# Altium PCB QBOOST-v0.2 - copia.PcbDoc
Units mm, origin at the board's own origin, x right, y up, seen from the top; angles counter-clockwise.
Board outline 219 x 105.6 mm, 2 copper layers (Top Layer, Bottom Layer); 39 components, 19 nets, 113 pads, 56 vias.
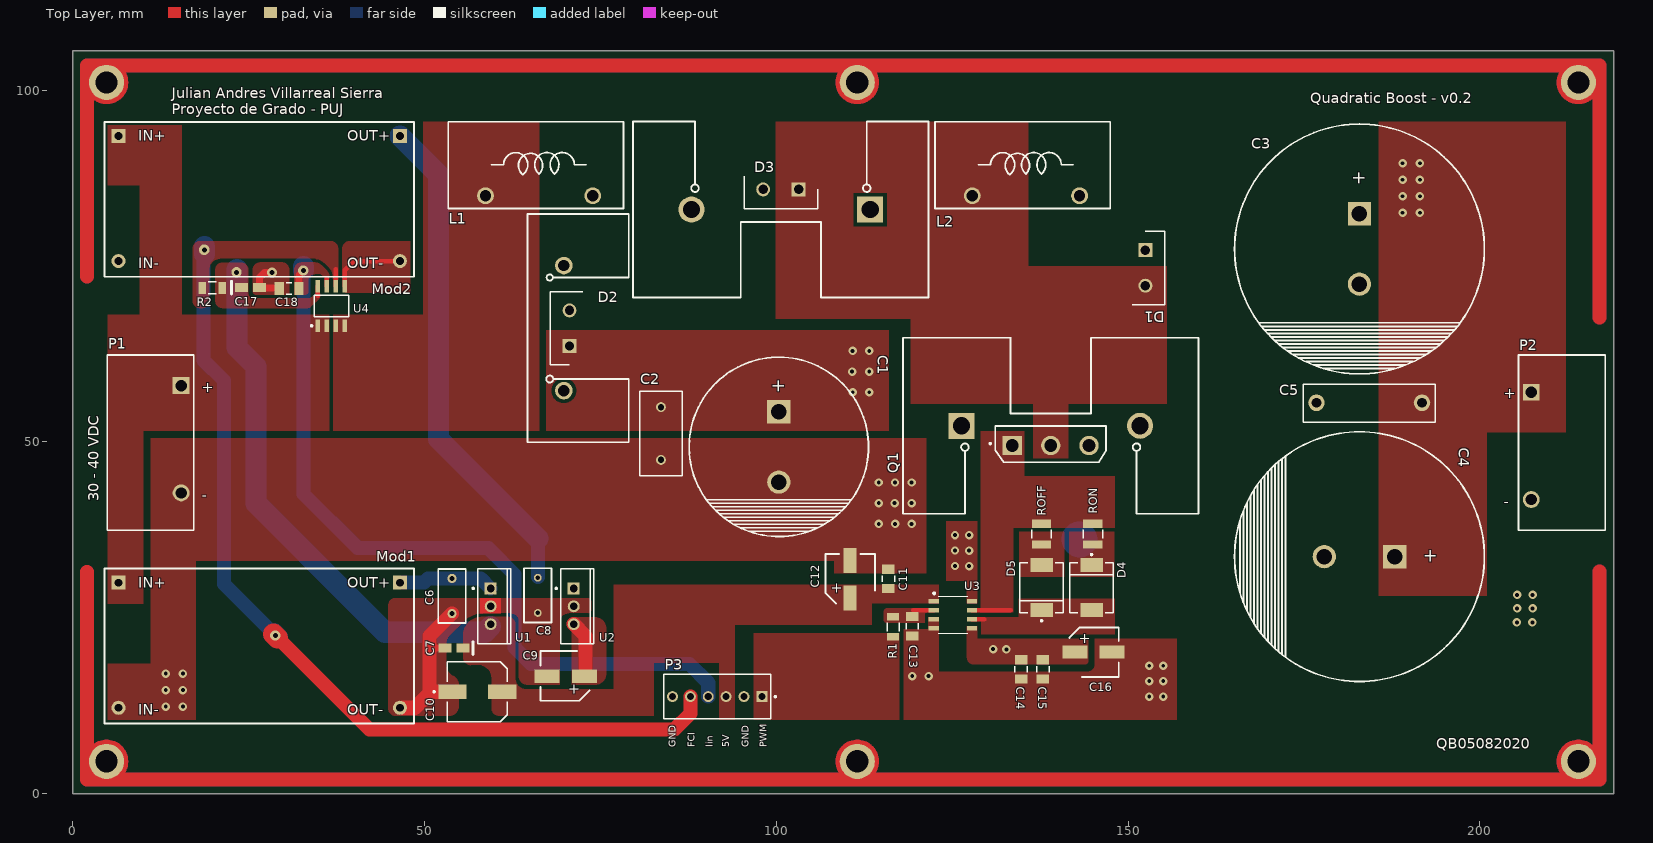
[diagram p0: Top Layer view]
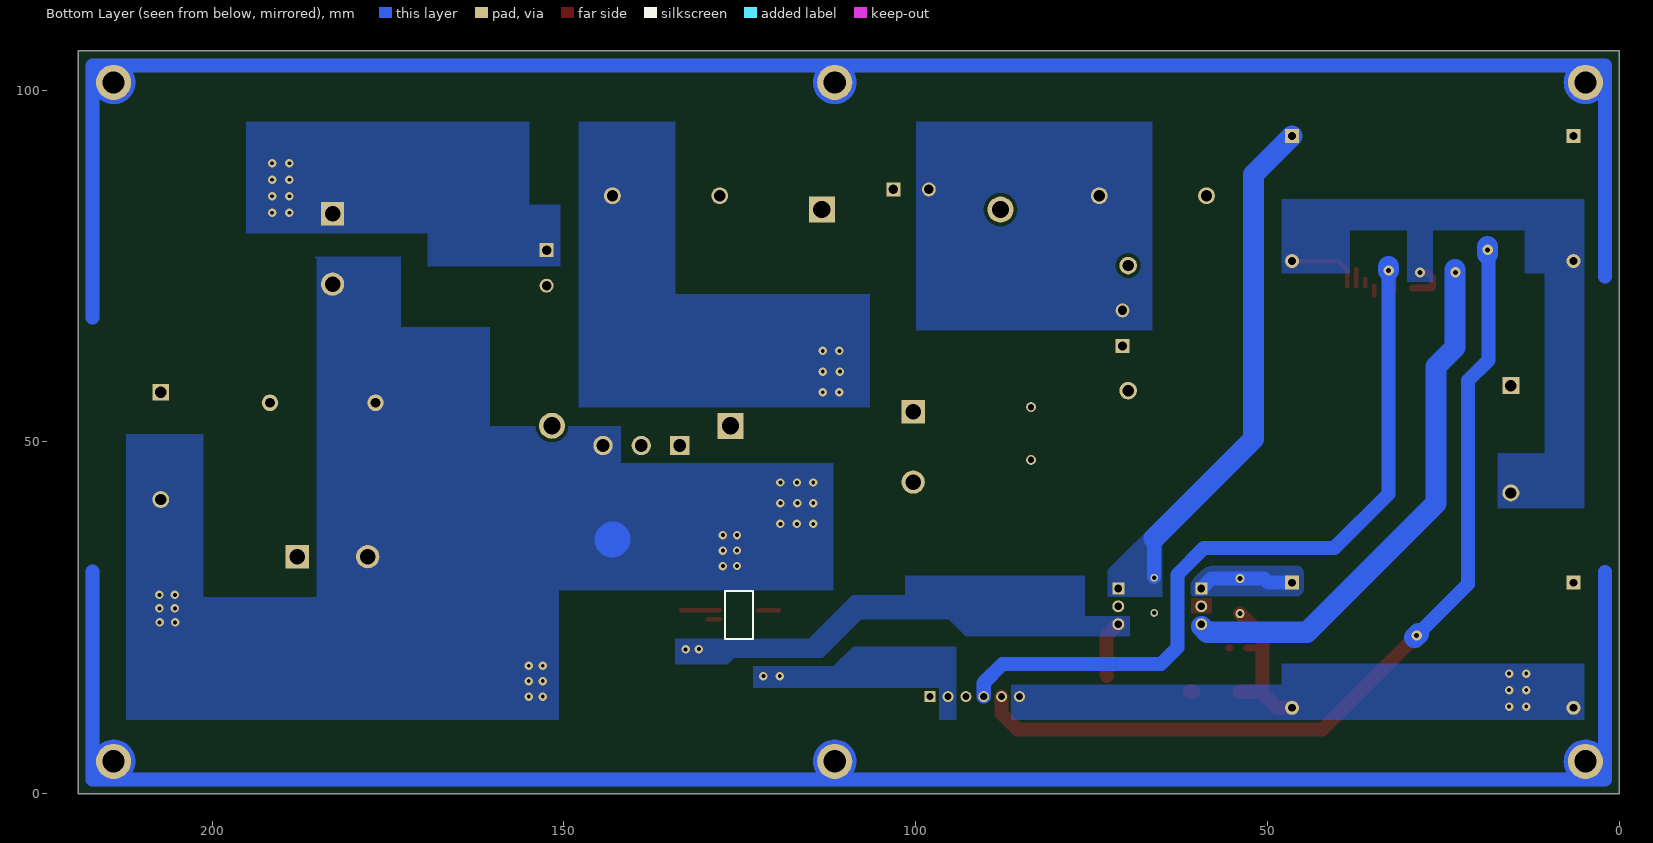
[diagram p1: Bottom Layer view, seen from below]
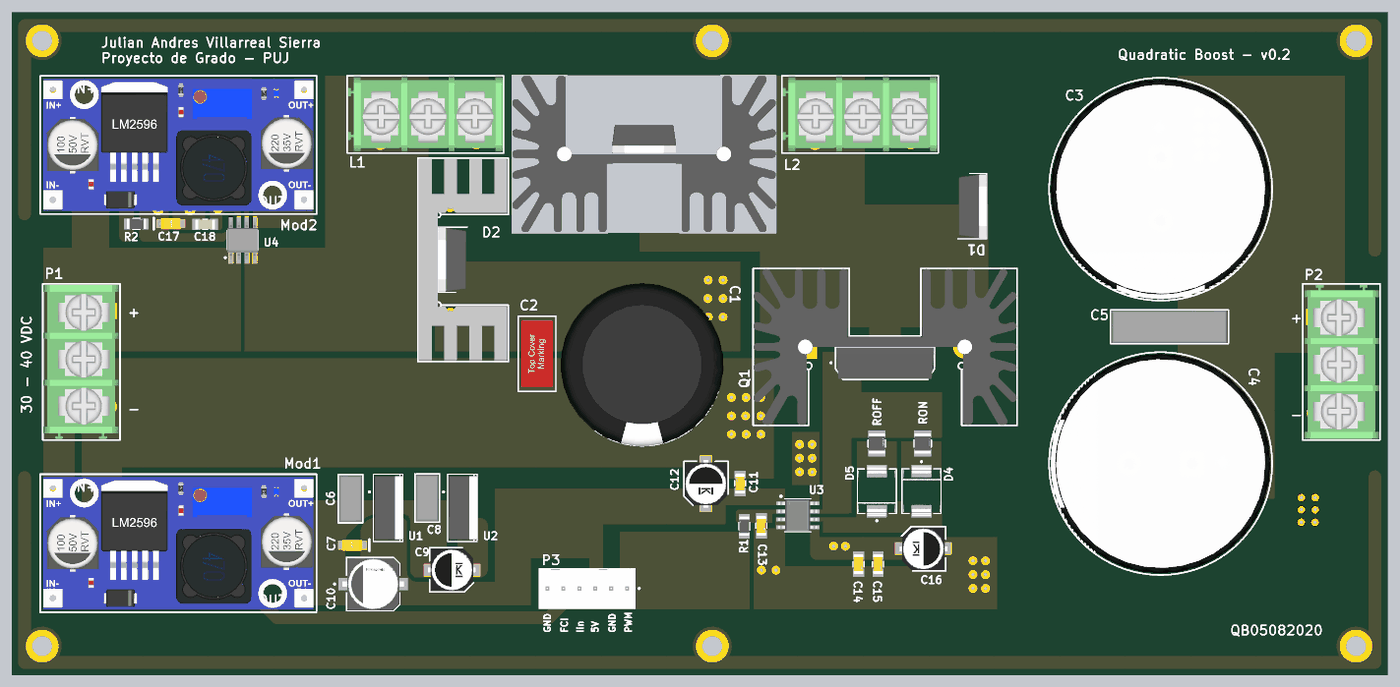
[diagram p2: 3D render of the assembled board from above, using the file's embedded part models]

## Layer stack, top to bottom
Top Solder: solder mask 0.0102, Solder Resist, Dk 3.5
Top Layer: signal copper 0.0356
Dielectric 1: dielectric 0.32, FR-4, Dk 4.8
Bottom Layer: signal copper 0.0356
Bottom Solder: solder mask 0.0102, Solder Resist, Dk 3.5

## Board outline
0,0 0,105.6 219,105.6 219,0

## Design rules (kind name [scope] priority, off if disabled: settings)
Clearance [All] p1: gap=0.5 ignorepadtopadclearanceinfootprint=FALSE
Height [All] p1: minheight=0 maxheight=70 prefheight=25
HoleSize [All] p1: absolutevalues=TRUE maxlimit=3.2 minlimit=0.5 maxpercent=80.000 minpercent=20.000
PolygonConnect [All] p1: connectstyle=Direct reliefconductorwidth=0.254 reliefentries=4 polygonreliefangle="90 Angle" airgapwidth=0.254
RoutingVias [All] p1: holewidth=0.7 width=1.47 viastyle="Through Hole" minholewidth=0.5 minwidth=1 maxholewidth=3.2 maxwidth=2
SolderMaskExpansion [All] p1: expansion=0.102
Width [All] p1: maxlimit=30 minlimit=0.254 preferedwidth=2
28 further rules are at their usual default settings.

## Components (designator, comment, footprint, x,y, rotation, side; value= is the part's Value field where it differs from the comment)
C1 "EET-UQ2C122CA" CAPPRD1000W200D2550H3700 100.354,54.3 r270 top
C2 "150nF, 250V" WCAP-FTBP_L10.5W5H11 83.6,51.2 r90 top
C3 "EET-UQ2G561EA" CAPPRD1000W200D3550H3700 182.88,82.43 r270 top
C4 "EET-UQ2G561EA" CAPPRD1000W200D3550H3700 187.88,33.7 r180 top
C5 "Capacitor Film 400V DC KEMET" "Cap Film 18x5" 191.77,55.57 r180 top
C6 "Capacitor FILM 0.47uF 5% 63VDC" "Capacitor 5mm Radial"#1 53.9,25.6 r90 top
C7 "T491A225K016AT" KEMT-T491-A_N 54.2,20.7 r180 top
C8 "Capacitor FILM 0.47uF 5% 63VDC" "Capacitor 5mm Radial"#2 66.1,25.7 r90 top
C9 "EMZR500ARA101MF80G" CAP6.3X8 78.75,19.025 r180 top
C10 "EEE-1HA101UP" FP-SF-MFG 57.5,14.5 r0 top value=100uF
C11 "CL31B105KBHNNNE" FP-CL31-IPC_B 115.92,30.54 r90 top
C12 "EEV226M050A9GAA" CAP6.3X5.65 110.45,30.49 r90 top
C13 "CL31C330JBCNNNC" FP-CL31-IPC_B 119.32,23.8 r270 top
C14 "CL31B224KBFNFNE" FP-CL31-IPC_B 134.79,17.67 r270 top
C15 "CL31B106KBHNNNE" FP-CL31-IPC_B 137.88,17.67 r270 top
C16 "EDH476M050A9HAA" CAP6.3X8 136.38,17.841 r0 top
C17 "T491A225K016AT" KEMT-T491-A_N 25.28,71.935 r0 top
C18 "C1206C471J5GACTU" FP-C1206C-EB-IPC_B 30.75,71.821 r180 top value="470 pF"
D1 "STPSC8065D" TO505P460X1020X1968-2P 152.45,77.26 r270 top
D2 "STPSC8065D_HEATSINK_V5229Y" "TO505P460X1020X1968-2P - HEATSINK - V5229Y" 69.816,57.284 r90 top
D3 "STPSC8065D_HEATSINK_RA-T2X-64E" "TO505P460X1020X1968-2P - HEATSINK - RA-T2X-64E" 113.343,83.041 r180 top
D4 "SS34-E3/57T" FP-95402-MFG 144.8,29.3 r270 top
D5 "SS34-E3/57T" FP-95402-MFG 137.7,29.295 r90 top
L1 "Inductor de potencia Externo" KF7.62-P3 58.66,85 r0 top
L2 "Inductor de potencia Externo" KF7.62-P3 127.86,85 r0 top
Mod1 "DC-DC LM2596" "Mod 21x43 mm" 6.5,30 r270 top
Mod2 "DC-DC LM2596" "Mod 21x43 mm" 6.5,93.491 r270 top
P1 "Terminal Block 2P - L" "KF7.62-P2 - TB - L" 15.4,42.76 r90 top
P2 "Terminal Block 2P - R" "KF7.62-P2 - TB - R" 207.3,57.06 r270 top
P3 "22-23-2061" MOLX-22-23-2061_V 91.59,13.8 r180 top
Q1 "STW65N65DM2AG with heatsink RA-T2X-64E" "FP-TO-247-0075325-MFG HEATSINK RA-T2X-64E" 139.298,47.365 r90 top
R1 "RC1206JR-51" FP-RC1206-IPC_B 116.601,23.72 r90 top value=0O
R2 "RC1206JR-51" FP-RC1206-IPC_B 19.82,71.904 r0 top value=0O
ROFF "RMCF1210JT5R10" FP-RC3225-IPC_B 137.685,36.907 r90 top
RON "RMCF1210JT5R10" FP-RC3225-IPC_B 144.99,36.907 r90 top
U1 "SCD7805BTG" T0220-3 59.4,26.64 r270 top
U2 "LM2940CT-15/NOPB" T0220-3 71.2,26.64 r270 top
U3 "UCC5310MCDR" D8_TEX 125.1,25.44 r0 top
U4 "ACS711KLCTR-12AB-T" ALEG-LC-SOIC-8_V 36.74,69.31 r0 top

## Footprints (in the part's own frame and the unit in brackets; to place one, negate y for a bottom-side part, rotate by r counter-clockwise, add the part's x,y. Pads: shape width x height; smd on the part's side, far side on the other; paste and mask are expansions set on the pad)
ALEG-LC-SOIC-8_V [mm] "SOIC, 8-Leads, Body 4.9x3.9mm, Pitch 1.27mm"
  rect 0.65x1.75 smd: 1(-1.905,-2.8) 2(-0.635,-2.8) 3(0.635,-2.8) 4(1.905,-2.8) 5(1.905,2.8) 6(0.635,2.8) 7(-0.635,2.8) 8(-1.905,2.8)
  silkscreen extent -2.9,-2.92 2.45,1.53, body extent -2.45,-3.05 2.45,2.95, height 1.51
CAP6.3X5.65 [mm] "Dia 6.3mm H 5.65mm"
  rect 3.55x1.85 smd: 1(-2.65,0) 2(2.65,0)
  silkscreen extent -3.43,-3.58 3.57,3.47, body extent -3.83,-3.42 3.78,3.37, height 5.67
CAP6.3X8 [mm] "Dia 6.3mm H 8mm"
  rect 3.55x1.85 smd: 1(6.05,2.325) 2(11.35,2.325)
  silkscreen extent 5.27,-1.25 12.27,5.8, body extent 4.92,-1.12 12.53,5.67, height 8.02
"Cap Film 18x5" [mm]
  round 2.35 hole 1.4: 1(0,0) 2(15,0)
  silkscreen extent -1.91,-2.63 16.89,2.75, body extent -1.65,-2.54 16.65,2.67, height 11.1
"Capacitor 5mm Radial"#1 [mm]
  round 1.3 hole 0.7: 1(0,0) 2(5,0)
  silkscreen extent -1.35,-1.95 6.35,1.95, body extent -1.2,-1.81 6.2,1.8, height 7.61
"Capacitor 5mm Radial"#2 [mm]
  round 1.1 hole 0.65: 1(0,0) 2(5,0)
  silkscreen extent -1.35,-1.95 6.35,1.95, body extent -1.2,-1.81 6.2,1.8, height 7.61
CAPPRD1000W200D2550H3700 [mm]
  rect 3.3x3.3 hole 2.2: 1(0,0)
  round 3.3 hole 2.2: 2(10,0)
  silkscreen extent -7.75,-12.75 17.75,12.75, body extent -8.17,-13.03 17.84,12.96, height 41.03
CAPPRD1000W200D3550H3700 [mm]
  rect 3.3x3.3 hole 2.2: 1(0,0)
  round 3.3 hole 2.2: 2(10,0)
  silkscreen extent -12.75,-17.75 22.75,17.75, body extent -12.5,-17.5 22.52,17.5, height 40.5
D8_TEX [mm]
  rect 1.455x0.6 smd paste+0 mask+0: 1(-2.721,1.905) 2(-2.721,0.635) 3(-2.721,-0.635) 4(-2.721,-1.905) 5(2.721,-1.905) 6(2.721,-0.635) 7(2.721,0.635) 8(2.721,1.905)
  silkscreen extent -2.79,-2.63 2.12,3.17, body extent -3.1,-2.5 3.1,2.5, height 1.76
FP-95402-MFG [mm]
  rect 2x3.2 smd paste+0 mask+0: 1(-3.205,0) 2(3.205,0)
  silkscreen extent -4.82,-3.11 3.55,3.11, body extent -4.17,-3.21 4.17,3.21, height 0.25
FP-C1206C-EB-IPC_B [mm]
  rect 1.305x1.806 smd paste+0 mask+0: 1(-1.401,0) 2(1.401,0)
  silkscreen extent -0.37,-0.8 0.37,0.8, body extent -2.3,-1.15 2.3,1.15, height 0.25
FP-CL31-IPC_B [mm]
  rect 1.305x1.758 smd paste+0 mask+0: 1(-1.376,0) 2(1.376,0)
  silkscreen extent -0.42,-0.88 0.42,0.88, body extent -2.28,-1.13 2.28,1.13, height 0.25
FP-RC1206-IPC_B [mm]
  rect 1.058x1.712 smd paste+0 mask+0: 1(-1.427,0) 2(1.427,0)
  silkscreen extent -0.6,-0.86 0.6,0.86, body extent -2.21,-1.11 2.21,1.11, height 0.25
FP-RC3225-IPC_B [mm]
  rect 1.155x2.756 smd paste+0 mask+0: 1(-1.476,0) 2(1.476,0)
  silkscreen extent -0.6,-1.38 0.6,1.38, body extent -2.3,-1.63 2.3,1.63, height 0.25
FP-SF-MFG [mm]
  rect 4x2 smd paste+0 mask+0: 1(-3.55,0) 2(3.55,0)
  silkscreen extent -6.27,-4.25 4.25,4.25, body extent -5.8,-4.5 5.8,4.5, height 0.25
"FP-TO-247-0075325-MFG HEATSINK RA-T2X-64E" [mm]
  rect 2.75x2.75 hole 1.8 paste-1000 mask+0: 1(2.127,5.75)
  round 2.75 hole 1.8 paste-1000 mask+0: 2(2.127,0.3) 3(2.127,-5.15)
  rect 3.7x3.7 hole 2.45 paste-1000 mask+0: 4(4.935,12.998)
  round 3.7 hole 2.45 paste-1000 mask+0: 5(4.935,-12.402)
  silkscreen extent -7.57,-20.7 17.43,21.3, body extent -7.51,-20.66 17.38,21.25, height 64.16
KEMT-T491-A_N [mm] "Molded Capacitor, 2-Leads, Body 3.40x1.80mm, IPC Medium Density"
  rect 1.85x1.25 smd: 1(-1.275,0) 2(1.275,0)
  silkscreen extent -2.7,-0.9 -2.7,0.9, body extent -1.7,-0.91 1.7,0.89, height 1.78
"KF7.62-P2 - TB - L" [mm]
  rect 2.4x2.4 hole 1.6: 1(15.24,0)
  round 2.4 hole 1.6: 2(0,0)
  silkscreen extent -5.3,-1.8 19.6,10.5, body extent -5.14,-1.61 19.4,10.41, height 12.22
"KF7.62-P2 - TB - R" [mm]
  rect 2.4x2.4 hole 1.6: 1(0,0)
  round 2.4 hole 1.6: 2(15.24,0)
  silkscreen extent -5.3,-1.8 19.6,10.5, body extent -5.14,-1.61 19.4,10.41, height 12.22
KF7.62-P3 [mm]
  round 2.4 hole 1.6: 1(0,0) 2(15.24,0)
  silkscreen extent -5.3,-1.8 19.6,10.5, body extent -5.14,-1.61 19.4,10.41, height 12.22
"Mod 21x43 mm" [mm]
  rect 2x2 hole 1.1: 1(0,0) 3(0,40)
  round 2 hole 1.1: 2(17.78,0) 4(17.78,40)
  silkscreen extent -2,-2 20,42, body extent -1.5,-1.5 19.5,41.5, height 14.82
MOLX-22-23-2061_V [mm] "THD, 6-Leads, Body 15.24x6.35mm, Pitch 2.54mm"
  rect 1.55x1.55 hole 1.02: 1(-6.35,0)
  round 1.55 hole 1.02: 2(-3.81,0) 3(-1.27,0) 4(1.27,0) 5(3.81,0) 6(6.35,0)
  silkscreen extent -8.4,-3.18 7.62,3.18, body extent -7.54,-3.25 7.54,3.1, height 10.67
T0220-3 [mm] "FM, 3-Leads, Body 10.7x4.7mm, Pitch 2.54mm"
  rect 1.7x1.7 hole 1.1: 1(-2.54,0)
  round 1.7 hole 1.1: 2(0,0) 3(2.54,0)
  silkscreen extent -5.35,-2.62 5.35,2.85, body extent -5.08,-1.69 5.08,2.88, height 19.56
TO505P460X1020X1968-2P [mm]
  rect 1.98x1.98 hole 1.32: 1(0,0)
  round 1.98 hole 1.32: 2(5.05,0)
  silkscreen extent -2.68,-1.88 7.73,2.72, body extent -2.56,-1.74 7.64,2.76, height 19.68
"TO505P460X1020X1968-2P - HEATSINK - RA-T2X-64E" [mm]
  rect 1.98x1.98 hole 1.32: 1(10.166,-2.859)
  round 1.98 hole 1.32: 2(15.216,-2.859)
  rect 3.7x3.7 hole 2.45 paste-1000 mask+0: 3(0.002,0.01)
  round 3.7 hole 2.45 paste-1000 mask+0: 4(25.402,0.01)
  silkscreen extent -8.3,-12.49 33.7,12.51, body extent -8.25,-12.44 33.66,12.46, height 64.16
"TO505P460X1020X1968-2P - HEATSINK - V5229Y" [mm]
  rect 1.98x1.98 hole 1.32: 1(6.366,-0.784)
  round 1.98 hole 1.32: 2(11.416,-0.784)
  round 2.5 hole 1.6: 3(0.006,0.02) 4(17.786,0.02)
  silkscreen extent -7.31,-9.2 25.1,5.2, body extent -7.1,-9 24.9,5, height 50.01
WCAP-FTBP_L10.5W5H11 [mm] "Film Capacitors, 10.5x5x11mm"
  round 1.4 hole 0.9: 1(-3.75,0) 2(3.75,0)
  silkscreen extent -6,-3 6,3, body extent -5.25,-2.5 5.25,2.5, height 11.05

## Part data
C1 C3 C4: "Capacitor Polarised", Manufacturer_Name=Panasonic, Datasheet Link=https://media.digikey.com/pdf/Data%20Sheets/Panasonic%20Capacitors%20PDFs/TS-UQ_Series_2007.pdf, Height=37mm
  C1: Arrow Part Number=EET-UQ2C122CA, Manufacturer_Part_Number=EET-UQ2C122CA
  C3 C4: Arrow Part Number=EET-UQ2G561EA, Manufacturer_Part_Number=EET-UQ2G561EA
C2: library part 890273322005CS, "WCAP-FTBP Film Capacitor, THT, L10.5W5H11, 150nF, 250V", Capacitance=150nF, Capacitance Tolerance=+/-5%, Insulation Resistance=30000MOhm, Manufacturer="Wurth Elektronik", Operating Temperature="-40 to +105degC", Rated Voltage=250VDC, Rate of Voltage Rise=340V/us, ComponentLink1Description=Manufacturer, ComponentLink1URL=http://www.we-online.de, ComponentLink2Description=Datasheet, ComponentLink2URL=https://www.we-online.com/catalog/datasheet/890273322005CS.pdf, Dissipation Factor@1kHz=0.1%, Dissipation Factor@10kHz=0.1%, Dissipation Factor@100kHz=0.26%, Height=11mm, Length=10.5mm, Manufacturer Part Number=890273322005CS, Mounting Technology=THT, Packaging=Carton, Pitch=7.5mm, Published Date="May 2020", Technical Reference=MPPP075154J250DCPP45004, Width=5mm
C5: library part "Cap film 400V DC 0.1uF"
C7 C17: library part CMP-2000-07187-1, "Tantalum Capacitor, 2.2 uF, +/- 10%, 16 V, -55 to 125 degC, 2-Pin SMD, RoHS, Tape and Reel", Capacitance=2200000pF, Case Code=A, Case Style=Molded, Manufacturer=Kemet, Operating Temp Range=-55Cto125C, Package / Case=3216-18, Package Description="2-Pin Surface Mount Device, Body 3.2 x 1.6 mm", Package Reference=T491-A, Tolerance (+ or -)=10%, Voltage=16VDC, Construction=SMTChip, Datasheet URL=http://capacitoredge.kemet.com/capedge2/DataSheet/Datasheet-T491A225K016AT.pdf?pn=T491A225K016AT, Datasheet Version=10/2016, DCL=0.4uA, DF=6%, ESR=6ohm, Failure Rate=NotRequired, Insulation=NotRequired, Lead Spacing (nom)=NotRequiredmm, Length W/Weld=NotRequiredmm, Length W/Weld (max)=NotRequiredmm, Manufacturer URL=http://www.kemet.com/, Mounting Style=SurfaceMount, Mounting Technology=SurfaceMount, Packaging=TapeandReel, Polarity=Polar, Product Depth (mm)=1.6mm, Product Diameter (mm)=NotRequiredmm, Product Height (mm)=1.6mm, Product Length (mm)=3.2mm, Rad Hardened=No, Seal=NotRequired, Seated Plane Height=NotRequiredmm, Wire Form=NotRequired
C9: "CAP ALUM 100UF 20% 50V SMD", Manufacturer_Name="United Chemi-Con", Datasheet Link=http://www.chemi-con.co.jp/cgi-bin/CAT_DB/SEARCH/cat_db_al.cgi?e=e&j=p&pdfname=mzr, Height=8.2mm, Manufacturer_Part_Number=EMZR500ARA101MF80G
C10: library part CMP-05427-000015-1, "CAP ALUM 100UF 20% 50V SMD", Capacitance=100uF, Leakage Current=100uA, Manufacturer=Panasonic, Package=SF, Ripple Current=200mA, Temperature="-40°C to +85°C", Temperature Range High=+85°C, Temperature Range Low=-40°C, Tolerance=20%, Voltage=50V, Automotive=Yes, Automotive Grade="Grade 3", Category=Cap, ComponentLink2Description=Datasheet, ComponentLink2URL=https://industrial.panasonic.com/cdbs/www-data/pdf/RDE0000/ABA0000C1145.pdf, Device Class L1="Passive Components", Device Class L2=Capacitors, Device Class L3="Aluminum Electrolytic Capacitors", Digikey Description="CAP ALUM 100UF 20% 50V SMD", Dissipation Factor=0.12%, Height=10.5mm, Lead Free=Yes, Life=2000Hours, Manufacturer Part Number=EEE-1HA101UP, Material=Aluminum, Mouser Description="Cap Aluminum Lytic 100uF 50V 20% (8 X 10.2mm) SMD 200mA 2000h 85C Automotive T/R", Octopart=https://octopart.com/eee-1ha101up-panasonic-55396734, RoHS=TRUE, Voltage Rating=50V
C11: library part CMP-13271-001662-1, "Cap Ceramic 1uF 50V X7R ±10% SMD 1206 +125°C Embossed T/R", Capacitance=1uF, Case/Package=1206, Case Code (Metric)=3216, Dielectric=X7R, Max Operating Temperature=125°C, Min Operating Temperature=-55°C, Package Quantity=1, Tolerance=10%, Voltage=50V, Case Code (Imperial)=1206, Contact Plating=Tin, Depth=1.6mm, Height=1.6mm, Lead Free="Lead Free", Length=3.2mm, Material=Ceramic, Mount="Surface Mount", Packaging="Tape and Reel", Radiation Hardening=No, Thickness=0.071inch, Voltage Rating=50V, Voltage Rating (DC)=50V, Width=0.063inch
C12: "CAP ALUM SMD 105C 22UF 50VDC", Manufacturer_Name=KEMET, Datasheet Link=https://content.kemet.com/datasheets/KEM_A4002_EEV.pdf, Height=5.65mm, Manufacturer_Part_Number=EEV226M050A9GAA
C13: library part CMP-13271-000198-1, "Cap Ceramic 33pF 50V C0G ±5% SMD 1206 +125°C Embossed T/R", Capacitance=33pF, Case/Package=1206, Case Code (Metric)=3216, Dielectric=C0G, Max Operating Temperature=125°C, Min Operating Temperature=-55°C, Package Quantity=1, Temperature Coefficient=300ppm/°C, Tolerance=5%, Voltage=50V, Case Code (Imperial)=1206, Depth=1.6mm, Height=0.85mm, Lead Free="Lead Free", Length=3.2mm, Material=Ceramic, Mount="Surface Mount", Packaging="Tape and Reel", Radiation Hardening=No, Thickness=0.039inch, Voltage Rating=50V, Voltage Rating (DC)=50V, Width=0.063inch
C14: library part CMP-13271-000776-1, "Cap Ceramic 220nF 50V X7R ±10% SMD 1206 +125°C Embossed T/R", Capacitance=220nF, Case/Package=1206, Case Code (Metric)=3216, Dielectric=X7R, Max Operating Temperature=125°C, Min Operating Temperature=-55°C, Package Quantity=1, Tolerance=10%, Voltage Rating=50V, Case Code (Imperial)=1206, Depth=1.6mm, Height=1.25mm, Length=0.126inch, Mount="Surface Mount", Packaging="Tape and Reel", Radiation Hardening=No, Thickness=0.055inch, Width=0.063inch
C15: library part CMP-13271-000776-1, "CAP CER 10UF 50V  X7R ±10% SMD 1206 +125°C Embossed T/R", Capacitance=220nF, Case/Package=1206, Case Code (Metric)=3216, Dielectric=X7R, Max Operating Temperature=125°C, Min Operating Temperature=-55°C, Package Quantity=1, Tolerance=10%, Voltage Rating=50V, Case Code (Imperial)=1206, Depth=1.6mm, Height=1.25mm, Length=0.126inch, Mount="Surface Mount", Packaging="Tape and Reel", Radiation Hardening=No, Thickness=0.055inch, Width=0.063inch
C16: "CAP ALUM SMD 105C 47UF 50VDC", Manufacturer_Name=KEMET, Datasheet Link=https://content.kemet.com/datasheets/KEM_A4049_EDH.pdf, Height=8mm, Manufacturer_Part_Number=EDH476M050A9HAA
C18: library part CMP-03020-008367-1, "1206 C 470pF Ceramic Multilayer Capacitor; 50 V; +125degC; C0G Dielectric; +/-5%", Capacitance="470 pF", Manufacturer=KEMET, Package=C1206C-EB, Temperature="-55°C to +150°C", Temperature Characteristic=C0G, Temperature Coefficient=15%, Temperature Range High=+150°C, Temperature Range Low=-55°C, Tolerance=0.05, Voltage Rating="50 V", Automotive=Yes, Automotive Grade="Grade 0", Category=Cap, ComponentLink2Description=Datasheet, ComponentLink2URL=https://content.kemet.com/datasheets/KEM_C1007_X8R_ULTRA_150C_SMD.pdf, Device Class L1="Passive Components", Device Class L2=Capacitors, Device Class L3="Ceramic Capacitors", Digikey Description="1206 C 470pF Ceramic Multilayer Capacitor; 50 V; +125degC; C0G Dielectric; +/-5%", Height=0.88mm, Ipc Land Pattern Name=CAPC320160X78, Lead Free=Yes, Manufacturer Part Number=C1206C471J5GACTU, Material=Ceramic, Mouser Description="1206 C 470pF Ceramic Multilayer Capacitor; 50 V; +125degC; C0G Dielectric; +/-5%", Octopart=https://octopart.com/c1206c471j5gactu-kemet-123947, RoHS=TRUE
D1: "Diode", Manufacturer_Name=STMicroelectronics, Arrow Part Number=STPSC8065D, Datasheet Link=http://www.mouser.com/datasheet/2/389/stpsc8065-1156476.pdf, Height=4.6mm, Manufacturer_Part_Number=STPSC8065D
D2: "Diode with heatsink V5229Y", Arrow Part Number=STPSC8065D, Manufacturer_Name=STMicroelectronics, Datasheet Link=http://www.mouser.com/datasheet/2/389/stpsc8065-1156476.pdf, Height=4.6mm, Manufacturer_Part_Number=STPSC8065D
D3: "Diode with heatsink RA-T2X-64E", Arrow Part Number=STPSC8065D, Manufacturer_Name=STMicroelectronics, Datasheet Link=http://www.mouser.com/datasheet/2/389/stpsc8065-1156476.pdf, Height=4.6mm, Manufacturer_Part_Number=STPSC8065D
D4 D5: library part CMP-02539-000012-1, "DIODE SCHOTTKY 40V 3A DO214AB", Forward Current=3A, Manufacturer=Vishay, Max Junction Temp=+150°C, Max Repetitive Reverse Voltage=40V, Max Surge Forward Current=100A, Package=95402, Peak Reverse Current=0.5mA, Temperature="-55°C to +150°C", Temperature Range Low=-55°C, Automotive=No, Category=Diode, ComponentLink2Description=Datasheet, ComponentLink2URL=http://www.vishay.com/docs/88751/ss32.pdf, Device Class L1="Discrete Semiconductors", Device Class L2=Diodes, Device Class L3="Schottky Diodes", Digikey Description="DIODE SCHOTTKY 40V 3A DO214AB", Footprint Url=http://www.vishay.com/docs/95402/smc.pdf, Height=2.62mm, Lead Free=Yes, Manufacturer Part Number=SS34-E3/57T, Mouser Description="Schottky Diodes & Rectifiers 3.0 Amp 40 Volt", Octopart=https://octopart.com/ss34-e3%2F57t-vishay-39552907, RoHS=TRUE, Standoff Height=0mm, Temperature Range High=+150°C
L1 L2: library part Inductor
Mod1 Mod2: "LM2596HV DC-DC Adjustable Step Down Buck Converter Power Module 4.5-50V To 3-35V Current limiting"
P1 P2: "Bornera con espaciado entre pines de 7.62mmSoporta hasta 20Amperios / Voltaje máximo de trabajo 300V / Calibre de cable ideal para acoplar 22 hasta 12 AWG / Cuenta con acoples laterales para aumentar los terminales"
P3: library part CMP-2000-05536-1, "Male Header, Pitch 2.54 mm, 1 x 6 Position, Height 10.67 mm, Tail Length 3.56 mm, 0 to 70 degC, RoHS, Bulk", Current rating=4A, Manufacturer=Molex, Package Description="Male Header, Pitch 2.54 mm, 1 x 6 Position, Height 10.67 mm, Tail Length 3.56 mm", Voltage Rating=250V, =002223206122-23-2061-PBA-6373-06A102, Brand=Molex, Contact material=Brass, Contact Plating=Tin, Datasheet URL=https://datasheet.ciiva.com/19460/232303-19460895.pdf, Datasheet Version="Rev. P, 09/2001", Factory Pack Quantity=1000, Housing material=Nylon, Manufacturer URL=http://www.molex.com/, Mounting Angle=Vertical, Mounting Style=ThroughHole, Mounting Technology=ThroughHole, Number of Positions=6, Number of Positions / Contacts=6, Number of Rows=1, Package Reference=22-23-2061, Packaging=Bulk, Pitch=2.54mm, Product Category=.100K.K.Connectors, Product Type=Headers, RoHS=Details, Series=6373, Termination Style=ThroughHole, Tradename=KK, Type=PinStrip
Q1: library part "MOSFET N STW65N65DM2AG_HEATSINK", "MOSFET N-CH 650V 60A TO-247", Continuous Drain Current=38A, Drain To Source Breakdown Voltage=650V, Drain To Source Resistance=0.05O, Gate To Source Voltage=25V, Input Capacitace At Vds="5500pF @ 100V", Manufacturer=STMicroelectronics, Manufacturer Part Number=STW65N65DM2AG, Max Forward Diode Voltage=1.6V, Max Junction Temp=+150°C, Package=TO-247-0075325, Power Dissipation=446W, Pulse Drain Current=240A, Temperature="-55°C to +150°C", Temperature Range Low=-55°C, Automotive=Yes, Automotive Grade="Grade 0", Category=Trans, ComponentLink2Description=Datasheet, ComponentLink2URL=https://www.st.com/resource/en/datasheet/stw22n95k5.pdf, Depletion Mode=False, Device Class L1="Discrete Semiconductors", Device Class L2=Transistors, Device Class L3=MOSFETs, Digikey Description="MOSFET N-CH 650V 60A TO-247", Drain To Source Voltage=650V, Gate Charge At Vgs="27nC @ 10V", Height=24.45mm, Ipc Land Pattern Name=TO-220, Lead Free=Yes, Number Of Channels=1, Number Of N Channels=1, Reverse Recovery Charge=3.65uC, Reverse Recovery Time=288ns, RoHS=TRUE, Rthja Max=50°C/W, Standoff Height=3.7mm, Temperature Range High=+150°C, Threshold Vgs Max=5V, Threshold Vgs Min=3V, Turn Off Delay Time=65ns, Turn On Delay Time=18ns
R1 R2: library part CMP-03412-007570-1, "RES SMD 51 OHM  1/4W 1206", Manufacturer=YAGEO, Manufacturer Part Number=RC1206JR-070RL, Package=RC1206, Power Rating=0.25W, Resistance=0O, Temperature="-55°C to +155°C", Temperature Coefficient=300ppm/°C, Temperature Range High=+155°C, Temperature Range Low=-55°C, Tolerance=5%, Voltage Rating=200V, Automotive=No, Category=Res, ComponentLink2Description=Datasheet, ComponentLink2URL=https://www.yageo.com/upload/media/product/productsearch/datasheet/rchip/PYu-RC_Group_51_RoHS_L_10.pdf, Composition="Thick Film", Device Class L1="Passive Components", Device Class L2=Resistors, Device Class L3="Chip SMD Resistors", Digikey Description="RES SMD 0 OHM JUMPER 1/4W 1206", Footprint Url=https://www.yageo.com/upload/website/yageo_PYu-R_Mount_10_19050818_343.pdf, Height=0.65mm, Ipc Land Pattern Name=RESC310160X55, Lead Free=Yes, Mouser Description="Resistor: thick film; SMD; 1206; 0O; 0.25W; ±5%; -55÷155°C", Octopart=https://octopart.com/rc1206jr-070rl-yageo-40025601, RoHS=TRUE, Series=RC
ROFF RON: library part CMP-13261-001722-1, "RES 5.1 OHM 5% 1/2W 1210", Case/Package=1210, Case Code (Metric)=3225, Max Operating Temperature=155°C, Max Power Dissipation=333mW, Min Operating Temperature=-55°C, Resistance=51R, Temperature Coefficient=100ppm/°C, Tolerance=5%, Voltage Rating (DC)=200V, Case Code (Imperial)=1210, Composition="Thick Film", Contact Plating=Tin, Features="Moisture Resistant", Height=0.026inch, Lead Free="Lead Free", Length=0.126inch, Number of Terminations=2, Packaging="Tape and Reel", Radiation Hardening=No, Width=0.1inch
U1: library part SCD7805BTGOS-ND, "IC VOLT REG 1A 5V TO220 3-pin", Manufacturer="On Semiconductor", PackageTopMarking="NSUZXYTTE#*LM2940CT*-15 P+", PowerWise=N, ComponentLink1Description="Datasheet URL", ComponentLink1URL=http://www.ti.com/general/docs/lit/getliterature.tsp?genericPartNumber=LM2940C&fileType=pdf, CompType="LDO IC", PackageDescription="TO-220, Molded, 3 Lead, Straight", PackageReference="CASE 221AB-01", PinCount=3, RoHS=Y
U2: library part CMP-0062-02546-3, "1A Low Dropout Regulator, 3-pin TO-220, Pb-Free", Manufacturer="Texas Instruments", PackageTopMarking="NSUZXYTTE#*LM2940CT*-15 P+", PowerWise=N, ComponentLink1Description="Datasheet URL", ComponentLink1URL=http://www.ti.com/general/docs/lit/getliterature.tsp?genericPartNumber=LM2940C&fileType=pdf, CompType="LDO IC", PackageDescription="TO-220, Molded, 3 Lead, Straight", PackageReference=NDE0003A, PinCount=3, RoHS=Y
U3: "No Description Available", Built_By=EMA_Molly, Copyright="Copyright (C) 2018 Accelerated Designs. All rights reserved", Manufacturer_Part_Number=UCC5310MCDR, RefDes=RefDes, SourceLibrary=TI_2020-05-18, Type=DEV, Vendor="Texas Instruments"
U4: "Hall Effect Linear Current Sensor with Overcurrent Fault Output for <100 V Isolation Applications, 3 to 5.5 V, -12.5 to 12.5 A IP, -40 to 125 degC, 8-Pin SOIC (LC), RoHS, Tape and Reel", Temperature Max="125 degC", Temperature Min="-40 degC", -3dB Bandwidth="0.1 MHz", ComponentLink1Description="Manufacturer URL", ComponentLink1URL=http://www.allegromicro.com/, ComponentLink2Description=Datasheet, ComponentLink2URL=http://www.allegromicro.com/~/media/Files/Datasheets/ACS711-Datasheet.ashx?la=en, ComponentLink3Description="Package Specification", ComponentLink3URL=http://www.allegromicro.com/~/media/Files/Datasheets/ACS711-Datasheet.ashx?la=en, DatasheetVersion="Rev. 3", IP Max="12.5 A", IP Min="-12.5 A", Mounting Technology="Surface Mount", PackageDescription="8-Pin Small Outline Integrated Package, Body 4.9 x 3.9 mm, Pitch 1.27 mm", Packing="Tape and Reel", PartNumber=ACS711KLCTR-12AB-T, RoHS=TRUE, VCC Max="5.5 V", VCC Min="3 V"

## Free pads (board coordinates)
  round 5 hole 3.175: 29(4.8,4.6) 29(4.8,101.1) 29(111.5,4.6) 29(111.5,101.1) 29(214,4.6) 29(214,101.1)

## Via types
v1: diameter 1.2, hole 0.55, Top Layer to Bottom Layer, 51 vias
v2: diameter 1.47, hole 0.711, Top Layer to Bottom Layer, 5 vias

## Nets (pads, with @x,y where several pads share a name; then routed paths per layer and width w, separated by ;. In a path a pad name is that pad's centre, name@x,y a point inside that pad or via, vN(x,y) a via of type N, cw(c..) or ccw(c..) an arc to the next point about the centre after c; other vN are vias at no path point)
GND: C1.2 C2.1 C3.2 C4.2 C5.2 C6.1 C7.2 C8.1 C9.2 C10.1 C11.2 C12.2 C13.2 C14.2 C15.2 C16.2 C17.2 C18.2 Mod1.2 Mod1.4 Mod2.2 Mod2.4 P1.2 P2.2 P3.2 P3.6 Q1.3 U1.2 U2.2 U3.3 U3.4 U3.8 U4.5 | length 39.9
  Top Layer w0.65: C17.2@26.55,71.97 C17.2@26.61,71.91 ; U4.5 38.645,74.416 39.94,75.711 Mod2.4 Mod2.4@46.89,75.711
  Top Layer w1: C17.2@26.55,71.97 26.55,73.359 27.282,74.091 v2(28.32,74.091) ; C17.2@26.61,71.91 26.637,71.883 29.323,71.883 C18.2@29.349,71.857 ; 50.7,20.7 C7.2
  Top Layer w2: Mod1.4@46.9,12.22 48.67,12.22 50.95,14.5 50.7,14.5 50.7,20.7 50.7,22.4 C6.1 ; 51.4,14.5 C10.1
  Bottom Layer w5: 143.048,36.162 143.12,36.09
  other v1: 13.22,12.38 15.66,12.38 155,13.8 153,13.81 13.22,14.727 15.66,14.727 153,16.01 155,16 119.32,16.72 121.64,16.72 13.22,17.073 15.66,17.073 153,18.2 155,18.2 205.25,24.35 207.45,24.35 205.29,26.34 207.49,26.34 205.29,28.27 207.49,28.27 127.39,32.36 125.39,32.37 125.39,34.57 127.39,34.56 125.39,36.76 127.39,36.76 114.546,38.36 116.886,38.36 119.226,38.36 114.546,41.3 116.8,41.3 119.226,41.3 114.546,44.24 116.866,44.24 119.226,44.24
NetC1_1: C1.1 C2.2 D2.1 L2.2
  other v1: 110.86,57.06 113.2,57.06 110.774,60 113.2,60 110.84,62.94 113.2,62.94
NetC3_1: C3.1 C4.1 C5.1 D1.1 P2.1
  other v1: 189.02,82.58 191.46,82.58 189.02,84.927 191.46,84.927 189.02,87.273 191.46,87.273 189.02,89.62 191.46,89.62
NetC6_2: C6.2 Mod1.3 U1.1 | length 13.3
  Bottom Layer w2: Mod1.3@46.9,30 49.9,30 50.5,30.6 C6.2 57.98,30.6 U1.1
NetC7_1: C7.1 C10.2 C11.1 C12.1 C17.1 P3.3 R2.2 U1.3 U3.1 U4.8 | length 77.6
  Top Layer w0.65: 34.835,70.761 U4.8
  Top Layer w1: C7.1@55.375,20.7 C7.1
  Top Layer w2: C10.2@60.525,14.5 C10.2
  Bottom Layer w3: v2@23.34,74.5 23.34,74.101 23.34,63.44 26.03,60.75 26.03,41.29 44.37,22.95 58.56,22.95 U1.3@59.4,23.79
  other v2: 23.27,74.101
NetC8_2: C8.2 Mod2.3 U2.1 | length 70.8
  Bottom Layer w2: C8.2@66.119,30.8 66.119,36.281
  Bottom Layer w3: Mod2.3 52,87.991 52,79.16 52,50.4 66.119,36.281
NetC9_1: C9.1 C14.1 C15.1 C16.1 U2.3 U3.5 | length 8.1
  Top Layer w2: U2.3 72.9,22.4 72.9,16.85 C9.1@72.825,16.775
  other v1: 132.69,20.52 130.81,20.55
NetC13_1: C13.1 R1.2 U3.2 | length 2.9
  Top Layer w0.6: 119.445,26.075 U3.2
NetC18_1: C18.1 P3.4 U4.7 | length 113.2
  Top Layer w0.65: U4.7 36.105,73.207
  Top Layer w1: C18.1@32.131,71.54 32.131,73.722 v2(32.78,74.371)
  Bottom Layer w2: v2@32.8,74.371 32.8,42.6 40.5,34.9 59.05,34.9 62.8,31.15 62.8,20.79 65.15,18.44 87.65,18.44 90.32,15.77 P3.4
  Bottom Layer w3: v2@32.8,74.371 v2@32.8,74.9
NetD1_2: D1.2 D3.1 L2.1 Q1.2
NetD2_2: D2.2 D3.2 L1.2
NetD4_1: D4.1 RON.1
NetD4_2: D4.2 D5.1 U3.6 | length 1.7
  Top Layer w0.6: U3.6 129.505,24.805 129.54,24.77
NetD5_2: D5.2 ROFF.1
NetL1_1: L1.1 U4.3 U4.4
NetMod1_1: Mod1.1 Mod2.1 P1.1 U4.1 U4.2
NetP3_1: P3.1 R1.1
NetP3_5: P3.5 R2.1 U4.6 | length 131.9
  Top Layer w0.65: U4.6 37.375,74.526
  Top Layer w2: v2(28.8,22.5) 42.16,9.14 85.49,9.14 87.78,11.43 P3.5
  Top Layer w3: v2@28.543,22.687 v2@29.1,22.13
  Bottom Layer w2: v2@18.6,77.2 18.6,61.61 21.49,58.72 21.49,29.81 v2(28.8,22.5)
  Bottom Layer w3: v2@18.7,76.7 v2@18.7,77.8 ; v2@28.533,22.737 v2@29.09,22.18
  other v2: 18.7,77.3
NetQ1_1: Q1.1 ROFF.2 RON.2 U3.7 | length 5.5
  Top Layer w0.6: U3.7 133.33,26.075
pads on no net: D2.3 D2.4 D3.3 D3.4 Q1.4 Q1.5
copper on no net: | length 1305.5
  Top Layer w1: 7.396,4.6 ccw(c4.8,4.6) 7.396,4.6 ; 7.396,101.1 ccw(c4.8,101.1) 7.396,101.1 ; 114.096,4.6 ccw(c111.5,4.6) 114.096,4.6 ; 114.096,101.1 ccw(c111.5,101.1) 114.096,101.1 ; 216.596,4.6 ccw(c214,4.6) 216.596,4.6 ; 216.596,101.1 ccw(c214,101.1) 216.596,101.1
  Top Layer w2: 2,31.5 2,2 217,2 217,31.6 ; 2,73.5 2,103.5 217,103.5 217,67.7
  Bottom Layer w1: 7.396,4.6 ccw(c4.8,4.6) 7.396,4.6 ; 7.396,101.1 ccw(c4.8,101.1) 7.396,101.1 ; 114.096,4.6 ccw(c111.5,4.6) 114.096,4.6 ; 114.096,101.1 ccw(c111.5,101.1) 114.096,101.1 ; 216.596,4.6 ccw(c214,4.6) 216.596,4.6 ; 216.596,101.1 ccw(c214,101.1) 216.596,101.1
  Bottom Layer w2: 2,31.5 2,2 217,2 217,31.6 ; 2,73.5 2,103.5 217,103.5 217,67.7

## Polygon pours and split planes (outlines as drawn)
GND on Top Layer (solid, pour order 574): 5,10.5 5,18.5 11.1,18.5 11.1,33.4 17.5,33.4 17.5,10.5
NetMod1_1 on Top Layer (solid, pour order 566): 5,27 10,27 10,51.6 5,51.6
no net on Top Layer (solid, pour order 562): 5,74
NetMod1_1 on Top Layer (solid, pour order 546): 5,95 15.5,95 15.5,67.9 9.5,67.9 9.5,86.5 5,86.5
NetC3_1 on Top Layer (solid, pour order 538): 185.59,28.12 185.59,95.5 212.2,95.5 212.2,51.36 200.98,51.36 200.98,28.12
GND on Top Layer (solid, pour order 528): 121.28,33.27 121.28,31.33 108.26,31.33 108.26,33.269
GND on Top Layer (solid, pour order 512): 118.092,10.5 156.88,10.5 156.88,22.01 145.252,22.01 145.252,18.36 cw(c144.252,18.36) 144.252,17.36 123.11,17.36 123.11,25.11 121.56,25.11 121.56,23.36 118.092,23.36
no net on Top Layer (solid, pour order 508): 156.88,22.01
no net on Top Layer (solid, pour order 506): 156.837,22.011
no net on Top Layer (solid, pour order 504): 156.837,22.01
NetC13_1 on Top Layer "Top Layer-NetC13_1" (solid, pour order 500): 121.37,25.78 121.68,25.78 121.68,26.37 121.061,26.37 115.763,26.371 ccw(c115.763,25.871) 115.263,25.871 115.263,24.771 ccw(c115.763,24.771) 115.763,24.271 121.06,24.271 121.06,25.47 cw(c121.37,25.47)
GND on Top Layer "Top Layer-GND 2" (solid, pour order 496): 128.55,27.05 128.55,38.74 124.15,38.74 124.15,30.3 127.09,30.3 127.09,27.05
NetQ1_1 on Top Layer "Top Layer-NetQ1_1" (solid, pour order 494): 135.2,45.11 135.2,51.5 129.07,51.5 129.07,25.78 133.7,25.78 133.7,37.8 148.1,37.8 148.1,45.11
NetD1_2 on Top Layer "Top Layer-NetD1_2" (solid, pour order 492): 155.46,74.99 135.8,74.99 135.8,95.5 99.9,95.5 99.9,67.5 119.1,67.5 119.1,55.46 136.5,55.46 136.5,47.7 141.5,47.7 141.5,55.46 155.46,55.46
no net on Top Layer "Top Layer-No Net 27" (solid, pour order 484): 135.8,67.5
no net on Top Layer "Top Layer-No Net 28" (solid, pour order 482): 135.8,67.5
NetMod1_1 on Top Layer "Top Layer-NetMod1_1" (solid, pour order 470): 5,51.58 5,68.1 36.44,68.1 36.44,51.58
NetC7_1 on Top Layer "Top Layer-NetC7_1" (solid, pour order 468): 94.12,24.04 113.59,24.04 113.59,27.04 123.11,27.04 123.11,29.71 76.862,29.71 76.862,14.84 64.52,14.84 cw(c64.52,16.46) 62.9,16.46 62.9,24.04 ccw(c61.791,24.04) 61.79,25.15 57.585,25.15 ccw(c57.583,23.67) 56.535,24.715 56.263,24.443 ccw(c58.161,22.543) 55.475,22.542 55.475,19.385 ccw(c56.58,19.385) 56.58,18.28 57.69,18.28 cw(c57.691,16.451) 59.52,16.45 59.52,12.13 ccw(c60.54,12.13) 60.54,11.11 62.9,11.11 75.03,11.11 82.57,11.11 82.57,18.65 91.91,18.65 91.91,10.5 94.12,10.5
no net on Top Layer "Top Layer-No Net 23" (solid, pour order 462): 112.839,25.58
NetC9_1 on Top Layer "Top Layer-NetC9_1 1" (solid, pour order 454): 75.8,23.56 75.8,16.99 cw(c74.31,16.99) 74.31,15.5 70.92,15.5 70.92,25.06 74.3,25.06 cw(c74.3,23.56)
GND on Top Layer "Top Layer-GND" (solid, pour order 448): 70.48,25.64 73.18,25.64 ccw(c73.18,26.14) 73.68,26.14 73.68,27.33 ccw(c73.19,27.33) 73.19,27.82 72.25,27.82 45.86,27.82 ccw(c45.86,26.82) 44.86,26.821 44.851,12.089 ccw(c45.85,12.089) 45.85,11.09 53.51,11.09 ccw(c53.51,12.45) 54.87,12.45 54.87,15.446 ccw(c53.378,15.446) 54.056,16.776 cw(c54.87,18.37) 53.08,18.37 53.08,21.329 cw(c54.628,21.329) 53.533,22.423 55.701,24.591 cw(c58.232,22.06) 58.233,25.64 62.28,25.64 cw(c62.28,24.521) 63.398,24.521 63.398,16.682 ccw(c64.56,16.682) 64.56,15.52 69.18,15.52 69.18,24.34 cw(c70.48,24.34)
GND on Top Layer "Top Layer-GND 5" (solid, pour order 446): 11.1,33.099 121.28,33.101 121.28,37.957 121.28,50.5 11.1,50.5
NetD4_2 on Top Layer "Top Layer-NetD4_2" (solid, pour order 438): 148.081,22.7 148.081,27.705 134.481,27.705 134.481,25.1 129.1,25.1 129.1,22.7
no net on Top Layer "Top Layer-No Net 24" (solid, pour order 424): 123.1,37.97
no net on Top Layer "Top Layer-No Net 25" (solid, pour order 414): 58.4,24.04
NetP3_5 on Top Layer "Top Layer-NetP3_5" (solid, pour order 384): 20.891,76.021 34.11,76.021 37.05,73.081 37.7,73.081 37.7,77.521 ccw(c36.7,77.521) 36.7,78.521 18.04,78.521 ccw(c18.04,77.521) 17.04,77.521 17.04,70.051 ccw(c18.06,70.051) 18.06,69.031 18.409,69.031 ccw(c18.409,70.022) 19.4,70.021 19.406,74.539 cw(c20.891,74.537)
NetC7_1 on Top Layer "Top Layer-NetC7_1 1" (solid, pour order 380): 21.27,69.031 33.343,69.031 ccw(c33.343,69.797) 33.884,69.256 35.009,70.381 ccw(c34.647,70.744) 35.16,70.744 35.16,71.181 34.51,71.181 cw(c34.342,71.181) 34.461,71.062 34.17,70.771 cw(c33.301,71.64) 33.301,70.411 25.68,70.411 cw(c25.68,71.151) 24.94,71.151 24.94,74.491 ccw(c23.94,74.491) 23.94,75.491 21.26,75.491 ccw(c21.26,74.491) 20.26,74.491 20.26,70.041 ccw(c21.27,70.041)
GND on Top Layer "Top Layer-GND 3" (solid, pour order 374): 26.61,75.511 29.76,75.511 cw(c29.76,74.521) 30.75,74.521 30.75,70.911 26.07,70.911 cw(c26.07,71.411) 25.57,71.411 25.57,74.471 cw(c26.61,74.471)
NetC18_1 on Top Layer "Top Layer-NetC18_1" (solid, pour order 370): 36.43,73.141 36.43,73.677 ccw(c35.528,73.678) 36.166,74.316 35.379,75.102 ccw(c34.392,74.115) 34.391,75.511 32.5,75.511 ccw(c32.5,74.511) 31.5,74.511 31.5,72.761 31.5,72.636 31.5,70.921 32.98,70.921 ccw(c32.98,71.429) 33.488,71.429 33.488,73.033 cw(c34.26,73.033) 34.065,73.78 cw(c34.386,72.553) 34.386,73.821 35.03,73.821 cw(c35.071,73.139) 35.722,73.35 35.8,73.141
GND on Top Layer "Top Layer-GND 4" (solid, pour order 368): 38.63,71.241 45.589,71.241 48,71.241 48,78.521 39.33,78.521 ccw(c39.33,77.511) 38.32,77.511 38.32,73.091 38.631,73.091
no net on Top Layer "Top Layer-No Net 20" (solid, pour order 364): 38.64,65.75
no net on Top Layer "Top Layer-No Net 21" (solid, pour order 362): 38.32,69.63
no net on Top Layer "Top Layer-No Net 22" (solid, pour order 360): 38.32,69.63
no net on Top Layer "Top Layer-No Net 10" (solid, pour order 332): 219.5,3
no net on Top Layer "Top Layer-No Net 11" (solid, pour order 328): 27.8,-11.3
no net on Top Layer "Top Layer-No Net 12" (solid, pour order 286): 148.05,36.52
no net on Top Layer "Top Layer-No Net 13" (solid, pour order 284): 148.05,36.52
NetP3_1 on Top Layer "Top Layer-NetP3_1" (solid, pour order 278): 117.46,22.82 117.46,10.5 96.78,10.5 96.78,22.82
no net on Top Layer "Top Layer-No Net 14" (solid, pour order 234): 111.44,23.96
no net on Top Layer "Top Layer-No Net 15" (solid, pour order 228): 123.09,25.57
NetL1_1 on Top Layer "Top Layer-NetL1_1" (solid, pour order 208): 66.32,95.5 49.82,95.5 49.82,68.1 37.05,68.1 37.05,51.6 66.32,51.6
NetC1_1 on Top Layer "Top Layer-NetC1_1" (solid, pour order 124): 116,51.6 116,65.9 67.3,65.9 67.3,51.6
no net on Top Layer "Top Layer-No Net 16" (solid, pour order 116): 130.2,26.501
no net on Top Layer "Top Layer-No Net 17" (solid, pour order 114): 130.2,25.8
NetC9_1 on Top Layer "Top Layer-NetC9_1" (solid, pour order 96): 127.094,23.78 128.55,23.78 128.55,22.017 144.324,22.017 144.324,18.88 cw(c143.824,18.88) 143.824,18.38 128.094,18.38 cw(c128.094,19.38) 127.094,19.38
NetD4_1 on Top Layer "Top Layer-NetD4_1" (solid, pour order 92): 141.6,30.835 141.6,37.265 148,37.265 148,30.835
NetD5_2 on Top Layer "Top Layer-NetD5_2" (solid, pour order 90): 134.5,30.835 134.5,37.265 140.9,37.265 140.9,30.835
no net on Top Layer "Top Layer-No Net 18" (solid, pour order 80): 127.15,25.6
no net on Top Layer "Top Layer-No Net 19" (solid, pour order 78): 127.15,25.6
no net on Top Layer "Top Layer-No Net 7" (solid, pour order 62): 159.55,16.7
no net on Top Layer "Top Layer-No Net 9" (solid, pour order 60): 160.2,17.1
no net on Top Layer "Top Layer-No Net 8" (solid, pour order 32): 3.4,99
no net on Top Layer "Top Layer-No Net 1" (solid, pour order 30): 66.4,59
no net on Top Layer "Top Layer-No Net 3" (solid, pour order 22): 103,70.8
no net on Top Layer "Top Layer-No Net 4" (solid, pour order 14): 102.4,86.9
no net on Top Layer "Top Layer-No Net 5" (solid, pour order 12): 102.5,89
no net on Top Layer "Top Layer-No Net 6" (solid, pour order 10): 102.5,89
no net on Top Layer "Top Layer-No Net" (solid, pour order 6): 25.725,50.7
no net on Top Layer "Top Layer-No Net 2" (solid, pour order 2): 4.775,62.5
NetC9_1 on Bottom Layer (solid, pour order 588): 107.7,24.8 113.2,19.3 125.8,19.3 126.7,18.4 134.2,18.4 134.2,22 115.2,22 109,28.2 101.47,28.2 101.47,31 76,31 76,25.2 69.6,25.2 69.6,22.4 92.9,22.4 95.3,24.8 101.47,24.8
GND on Bottom Layer (solid, pour order 582): 94.24,20.9 94.24,10.5 96.66,10.5 96.66,15.1 123.1,15.1 123.1,18.1 111.7,18.1 108.9,20.9
GND on Bottom Layer (solid, pour order 578): 5,10.5 13.4,10.5 38.3,10.5 86.4,10.5 86.4,15.5 48,15.5 48,18.5 5,18.5
GND on Bottom Layer (solid, pour order 568): 26.5,72.8 30.1,72.8 30.1,80.1 38.3,80.1 38.3,74 48,74 48,84.5 5,84.5 5,40.6 17.3,40.6 17.3,48.4 10.6,48.4 10.6,74 13.4,74 13.4,80.1 26.5,80.1
GND on Bottom Layer (solid, pour order 542): 150.75,10.5 212.18,10.5 212.18,51.1 201.24,51.1 201.24,27.91 185.13,27.91 185.13,76.01 185.41,76.29 173.18,76.29 173.18,66.27 160.52,66.27 160.52,52.2 141.9,52.2 141.9,47 111.71,47 111.71,28.9 150.75,28.9
NetC3_1 on Bottom Layer (solid, pour order 536): 169.358,74.99 169.358,79.63 195.12,79.63 195.12,95.5 154.9,95.5 154.9,83.7 150.49,83.7 150.49,74.99
no net on Bottom Layer "Bottom Layer-No Net 7" (solid, pour order 478): 135.8,67.5
NetC1_1 on Bottom Layer "Bottom Layer-NetC1_1" (solid, pour order 476): 134.2,95.5 147.9,95.5 147.9,54.9 106.5,54.9 106.5,71 134.2,71
no net on Bottom Layer "Bottom Layer-No Net 8" (solid, pour order 474): 135.8,95.5
NetC6_2 on Bottom Layer "Bottom Layer-NetC6_2" (solid, pour order 396): 44.86,29.08 44.86,31.4 cw(c45.86,31.4) 45.86,32.4 57.583,32.4 cw(c57.583,29.728) 59.473,31.617 60.346,30.744 cw(c58.936,29.334) 60.93,29.334 60.93,28.58 cw(c60.431,28.58) 60.432,28.081 45.868,28.072 cw(c45.867,29.08)
NetC8_2 on Bottom Layer "Bottom Layer-NetC8_2" (solid, pour order 280): 72.7,28 64.939,28 64.951,39.518 72.7,31.866
no net on Bottom Layer "Bottom Layer-No Net 2" (solid, pour order 184): 159.92,52.18
no net on Bottom Layer "Bottom Layer-No Net 3" (solid, pour order 178): 145.64,49.61
no net on Bottom Layer "Bottom Layer-No Net 4" (solid, pour order 154): 207.55,5.69
no net on Bottom Layer "Bottom Layer-No Net 5" (solid, pour order 152): 207.18,6.59
no net on Bottom Layer "Bottom Layer-No Net 6" (solid, pour order 150): 207.7,6.29
NetD2_2 on Bottom Layer "Bottom Layer-NetD2_2" (solid, pour order 126): 66.4,65.9 99.9,65.9 99.9,95.5 66.4,95.5
no net on Bottom Layer "Bottom Layer-No Net" (solid, pour order 50): 102.75,75.2
no net on Bottom Layer "Bottom Layer-No Net 1" (solid, pour order 48): 102.75,80.4

## Other copper
Top Layer:
  rectangle net GND: 57.9,25.65 60.9,27.8
  region: 70.65,94.09
  region: 161.21,26.89
  region: 151.89,26.39
  region net NetD5_2: 140.49,30.05
  region net NetD5_2: 140.49,30.26
  region: 133.53,26.01
  region net NetQ1_1: 129.24,24.31
  region net NetMod1_1: 10.79,57.28
  region net NetMod1_1: 10.52,57.46
  region net NetQ1_1: 130.8,39.63
  pour cut-out: 0.9,65.5 3.1,65.5 3.1,34.2 0.9,34.2
  pour cut-out: 215.9,65.3 217.903,65.3 217.903,34 215.9,34
  region net GND: 63.35,26.75
  region: 124.9,58.9
  region: 144.4,51
  region: 144.4,51
  region net NetC1_1: 93.4,44
  region net NetC1_1: 93.4,43
  region net NetC1_1: 94.4,44
Bottom Layer:
  region net GND: 140.07,42.83
  region net GND: 140.73,45.42
  pour cut-out: 219.8,33.6
  region: 124.8,75.5
  region net GND: 135.3,40.1
  region net GND: 135.3,40.8
  region net GND: 135.3,40.1

## Silkscreen, mask and mechanical layers (free items; w line width, h text height)
Top Overlay:
  text "Quadratic Boost - v0.2" at 175.9,98.16 h1.52
  text "Julian Andres Villarreal Sierra / Proyecto de Grado - PUJ" at 14.1,96.6 h1.52
  text "+" at 18.3,57.1 h1.52
  text "+" at 203.4,56.2 h1.52
  text "-" at 18.3,41.7 h1.52
  text "30 - 40 VDC" at 3.7,41.6 h1.52 r90
  text "-" at 203.4,40.8 h1.52
  text "GND" at 85.72,6.6 h1 r90
  text "FCI" at 88.43,6.6 h1 r90
  text "Iin" at 90.93,6.6 h1 r90
  text "5V" at 93.32,6.6 h1 r90
  text "GND" at 96.05,6.6 h1 r90
  text "PWM" at 98.61,6.6 h1 r90
  text "QB05082020" at 193.8,6.4 h1.52
Bottom Overlay:
  lines w0.254: 123.1,22 127.1,22 127.1,22.8 127.1,28.8 123.1,28.8 123.1,22
Mechanical 1:
  the board outline again, w0.254

## Text inside footprints (layer, text, board x,y; h text height)
C1: Top Overlay "+" at 99.454,59 h1.8 r270
C3: Top Overlay "+" at 181.98,88.58 h1.8 r270
C4: Top Overlay "+" at 194.03,34.6 h1.8 r180
C9: Top Overlay "+" at 72.15,15.5 h1.5 r180
C12: Top Overlay "+" at 109.25,28.39 h1.5 r90
C16: Top Overlay "+" at 142.98,21.366 h1.5
Mod1: Top Overlay "OUT-" at 39,11.2 h1.52; Top Overlay "OUT+" at 39,29.3 h1.52; Top Overlay "IN-" at 9.3,11.2 h1.52; Top Overlay "IN+" at 9.3,29.3 h1.52
Mod2: Top Overlay "IN+" at 9.3,92.791 h1.52; Top Overlay "IN-" at 9.3,74.691 h1.52; Top Overlay "OUT+" at 39,92.791 h1.52; Top Overlay "OUT-" at 39,74.691 h1.52
U3: Mechanical 13 "*" at 123.17,26.596 h1.27